# Altium PCB 宁波2号线PIS_数字功率放大器_功放板(BHC-A-2030-01)_PCB(06001536)_V1.0.PcbDoc (part 3 of 3)
Units mm, origin at the board's own origin, x right, y up, seen from the top; angles counter-clockwise.
Board outline 162 x 100 mm, 2 copper layers (Top Layer, Bottom Layer); 141 components, 101 nets, 408 pads, 79 vias.
Unrouted connection lines stored in the file: 2.
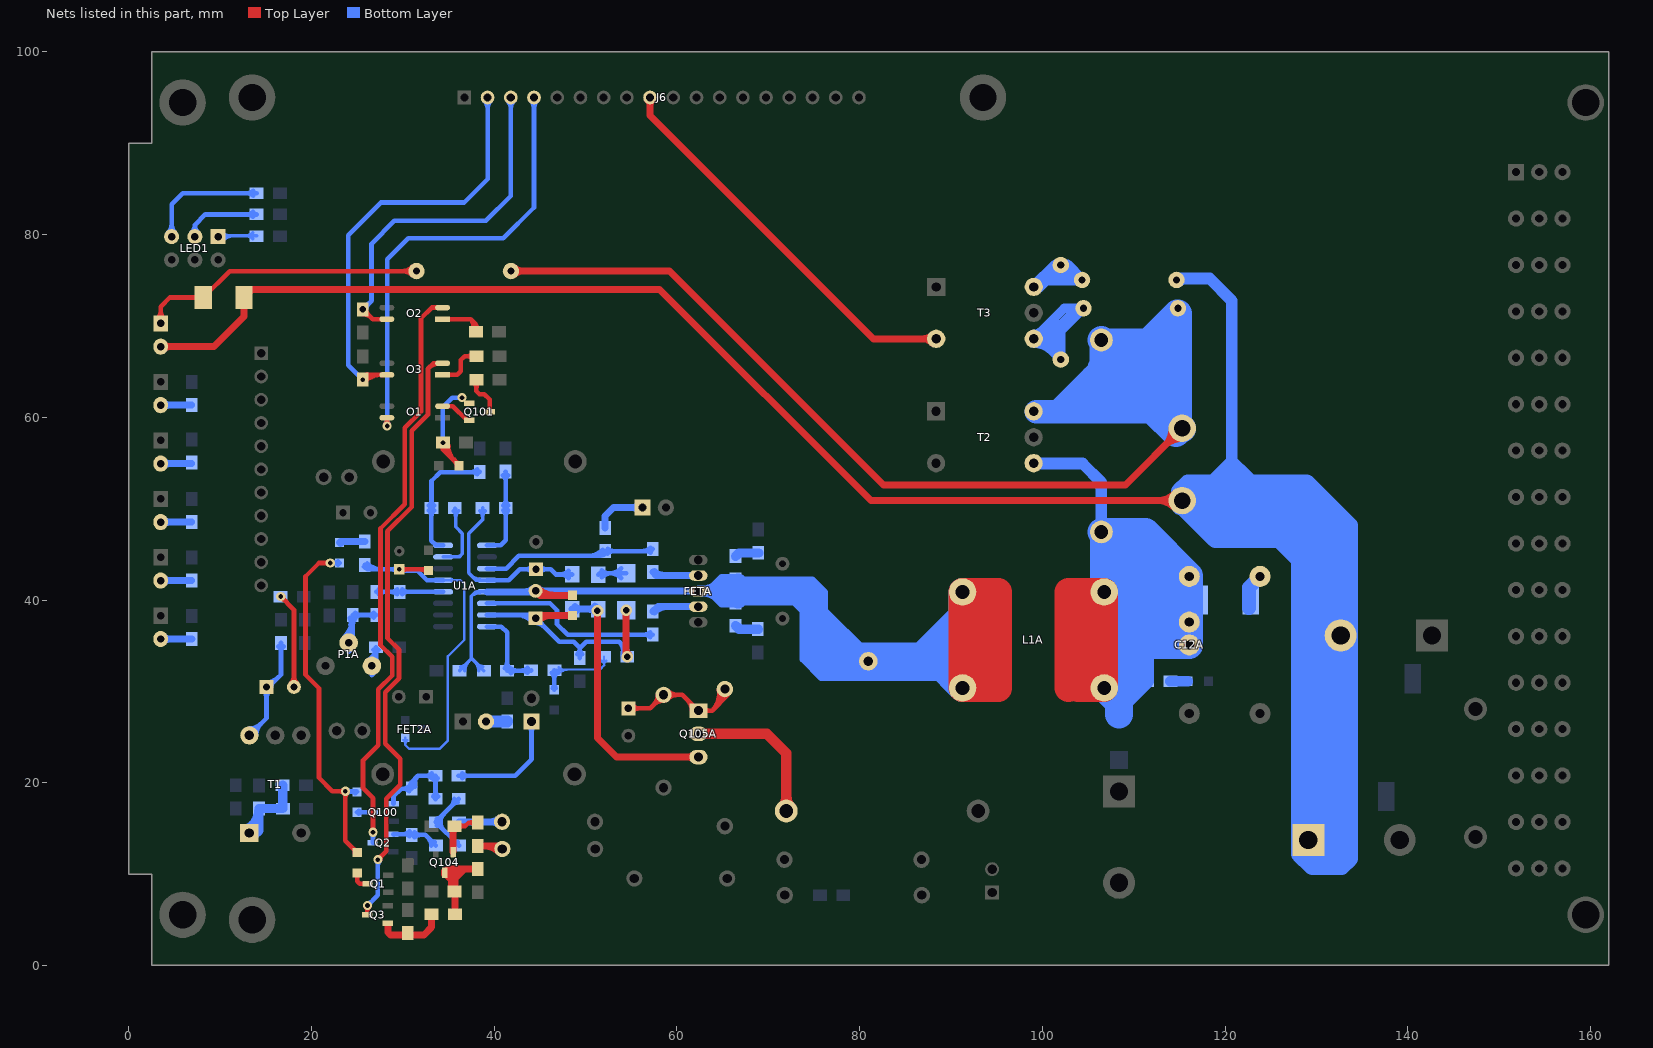
[diagram p3: the nets of this part, all layers, seen from the top]

## Via types
v1: diameter 1.016, hole 0.508, Top Layer to Bottom Layer, 57 vias
v2: diameter 1.27, hole 0.711, Top Layer to Bottom Layer, 21 vias
v3: diameter 0.762, hole 0.457, Top Layer to Bottom Layer, 1 vias

## Nets (pads, with @x,y where several pads share a name; then routed paths per layer and width w, separated by ;. In a path a pad name is that pad's centre, name@x,y a point inside that pad or via, vN(x,y) a via of type N, cw(c..) or ccw(c..) an arc to the next point about the centre after c; other vN are vias at no path point) (continued)
NetC4A_2: C4A.2 C6A.1 P1A.2 | length 17
  Bottom Layer w0.508: P1A.2@23.536,35.871 ccw(c21.137,38.27) C4A.2@24.53,38.27 ; P1A.2@23.896,35.512 ccw(c22.364,37.043) 24.53,37.043 ; 24.044,34.301 24.53,34.787 C4A.2@24.53,38.35 24.537,38.356 C6A.1@27.103,38.356 ; C4A.2@24.2,38.032 cw(c23.44,37.593) 24.288,37.366 ; C4A.2@24.261,37.953 cw(c23.61,37.303) 24.53,37.303 cw(c25.45,37.303) C4A.2@24.8,37.953 ; 24.273,37.309 cw(c25.201,37.06) C4A.2@24.721,37.893 ; C4A.2@24.8,38.08 cw(c25.466,37.414) 25.466,38.356 ; C4A.2@24.8,38.619 ccw(c25.434,39.254) 25.434,38.356 ; C6A.1@26.833,38.087 ccw(c26.183,37.437) 26.183,38.356 ccw(c26.183,39.276) C6A.1@26.833,38.626
NetC5_2: C5.2 R01.2 R02.1 T1.1 | length 12.2
  Bottom Layer w1.016: T1.1@12.963,14.939 ccw(c11.713,17.16) R02.1@14.262,17.16 ; T1.1@13.461,14.054 ccw(c12.691,15.422) 14.262,15.422 ; T1.1@14.042,14.561 14.262,14.78 R02.1@14.262,17.16 ; R01.2@16.854,19.733 16.854,17.193 14.295,17.193 R02.1@14.262,17.16
NetC6A_2: C6A.2 C7A.2 U1A.4 | length 11.6
  Bottom Layer w0.508: C6A.2@27.103,40.896 C7A.2@29.653,40.896 29.657,40.901 U1A.4@34.413,40.901 ; C6A.2@27.372,40.627 cw(c28.023,39.977) 28.023,40.896 cw(c28.023,41.816) C6A.2@27.372,41.166 ; C7A.2@29.383,40.627 ccw(c28.733,39.977) 28.733,40.896 ccw(c28.733,41.816) C7A.2@29.383,41.166 ; C7A.2@29.922,40.627 cw(c30.583,39.967) 30.583,40.901 ; C7A.2@29.922,41.166 ccw(c30.563,41.806) 30.563,40.901
NetC8A_2: C8A.2 R28A.1 | length 3.5
  Bottom Layer w1.016: R28A.1@66.413,44.804 66.761,45.152 C8A.2@68.948,45.152 ; R28A.1@66.503,44.841 cw(c67.253,44.092) 67.253,45.152
NetC9A_1: C9A.1 R29A.2 | length 3.6
  Bottom Layer w1.016: R29A.2@66.413,37.184 66.802,36.795 C9A.1@68.922,36.795 ; R29A.2@66.503,37.147 ccw(c67.353,37.996) 67.353,36.795
NetC13A_2: C13A.2 R30A.1 | length 3.9
  Bottom Layer w1.524: R30A.1@122.612,39.141 122.612,41.371 C13A.2@123.825,42.584
NetC100_2: C100.2 Q100.1 R1.1 R3.1 | length 17.1
  Bottom Layer w0.508: Q100.1@28.985,17.695 28.985,18.531 29.807,19.352 C100.2@30.958,19.352 30.958,20.072 31.654,20.768 ; C100.2@30.688,19.083 ccw(c30.038,18.433) 30.038,19.352 ccw(c30.038,20.272) C100.2@30.688,19.622 ; C100.2@30.835,19.448 cw(c31.534,19.627) 31.024,20.138 ; C100.2@31.327,19.574 cw(c32.538,19.884) 31.654,20.768 ; R3.1@33.161,20.499 ccw(c32.511,19.848) 32.511,20.768 ccw(c32.511,21.688) R3.1@33.161,21.037 ; R3.1@33.288,20.499 cw(c32.577,19.787) 33.583,19.787 ; R1.1@33.314,18.497 ccw(c32.663,19.148) 33.583,19.148 ccw(c34.503,19.148) R1.1@33.853,18.497 ; R1.1@33.583,18.228 33.583,20.743 R3.1@33.558,20.768 31.654,20.768 ; 33.583,19.91 cw(c34.416,19.91) R3.1@33.827,20.499
NetC101_2: C101.2 Q2.1 R2.2 | length 9.6
  Bottom Layer w0.508: Q2.1@29.03,14.298 Q2.1@28.96,14.368 30.938,14.368 31.008,14.298 32.449,14.298 R2.2@33.618,13.129 ; 29.951,14.368 ccw(c29.951,15.482) C101.2@30.739,14.694 ; 30.226,14.368 cw(c30.226,13.642) C101.2@30.739,14.155 ; C101.2@31.278,14.028 cw(c31.928,13.378) 31.928,14.298 cw(c31.928,15.218) C101.2@31.278,14.567 ; 32.75,13.996 cw(c31.883,13.129) R2.2@33.11,13.129 ; R2.2@33.057,13.69 ccw(c33.491,14.123) R2.2@33.491,13.51
NetC102_2: C102.2 Q3.1 R108.2 | length 7.3
  Top Layer w0.762: 28.368,4.274 28.368,3.639 28.664,3.343 30.526,3.343 32.314,3.343 33.16,4.19 R108.2@33.16,5.604
NetCP1A_2: CP1A.2 R2A.1 | length 13.4
  Top Layer w0.508: v1@16.633,40.139 cw(c16.633,39.526) 17.067,39.959 cw(c17.5,40.393) v1@16.887,40.393 ; v1(16.633,40.393) 18.084,38.942 CP1A.2@18.084,30.487 ; CP1A.2@17.725,30.846 ccw(c16.857,31.713) 18.084,31.713 ccw(c19.31,31.713) CP1A.2@18.443,30.846
NetCP3A_1: CP3A.1 D7A.2 FET2A.2 R3A.1 U1A.5 | length 47.8
  Top Layer w0.508: CP3A.1@29.388,43.116 CP3A.1@29.627,43.355 32.675,43.355 D7A.2@32.813,43.217 ; CP3A.1@29.852,43.131 cw(c30.394,42.589) 30.394,43.355 cw(c30.394,44.122) CP3A.1@29.852,43.58 ; 31.887,43.355 cw(c31.887,42.291) D7A.2@32.639,43.043
  Bottom Layer w0.254: FET2A.2@30.043,24.687 cw(c29.501,24.135) 30.275,24.135 ; FET2A.2@30.275,24.923 30.275,24.135 ; FET2A.2@30.506,24.687 ccw(c31.048,24.135) 30.275,24.135 ; U1A.5@34.413,42.171 36.307,42.171 36.739,41.739 36.739,35.643 34.936,33.839 34.936,24.634 34.007,23.705 30.705,23.705 30.275,24.135 ; U1A.5@35.335,42.048 cw(c35.631,41.753) 35.631,42.171 cw(c35.631,42.588) U1A.5@35.335,42.293
  Bottom Layer w0.508: R3A.1@25.755,43.632 ccw(c26.424,44.301) R3A.1@26.424,43.355 ; R3A.1@25.845,43.849 26.338,43.355 CP3A.1@29.627,43.355 29.77,43.212 31.608,43.212 32.65,42.171 U1A.5@34.413,42.171 ; R3A.1@26.114,43.991 ccw(c27.65,45.527) 27.65,43.355 ; CP3A.1@29.403,43.131 ccw(c28.861,42.589) 28.861,43.355 ccw(c28.861,44.122) CP3A.1@29.403,43.58 ; CP3A.1@29.852,43.58 ccw(c30.739,44.467) 30.739,43.212
NetCP5A_1: CP5A.1 R21A.1 R26A.2 U1A.12 | length 28.7
  Bottom Layer w0.381: 37.537,42.643 ccw(c38.413,43.519) U1A.12@38.413,42.28 ; R26A.2@38.411,49.762 cw(c37.653,49.003) 38.726,49.003 cw(c39.799,49.003) R26A.2@39.04,49.762 ; R26A.2@38.726,50.076 38.726,48.78 37.222,47.276 37.222,42.958 38.009,42.171 U1A.12@39.213,42.171
  Bottom Layer w0.508: U1A.12@39.213,42.171 41.591,42.171 42.784,43.364 CP5A.1@44.588,43.364 46.188,43.364 46.752,42.801 R21A.1@48.525,42.801 ; CP5A.1@44.229,43.005 ccw(c43.361,42.138) 43.361,43.364 ccw(c43.361,44.591) CP5A.1@44.229,43.724 ; CP5A.1@44.947,43.005 cw(c45.814,42.138) 45.814,43.364 cw(c45.814,44.591) CP5A.1@44.947,43.724 ; R21A.1@48.139,42.415 ccw(c47.207,41.482) 47.207,42.801 ccw(c47.207,44.119) R21A.1@48.139,43.187
NetCP6A_1: CP6A.1 D3A.2 R17A.1 R22A.1 U1A.15 Z105A.2 | length 46.1
  Top Layer w0.762: CP6A.1@44.537,38.005 44.822,38.29 Z105A.2@48.561,38.29 ; CP6A.1@44.806,37.736 cw(c46.144,36.398) 46.144,38.29 ; 54.443,34.679 ccw(c55.462,34.679) v2@54.741,33.959 ; v2(54.443,38.869) 54.443,33.898 v2(54.562,33.779)
  Bottom Layer w0.508: U1A.15@39.213,38.361 44.181,38.361 CP6A.1@44.537,38.005 ; 42.452,38.361 cw(c42.452,35.92) CP6A.1@44.178,37.646 ; 43.679,38.361 cw(c43.679,37.147) CP6A.1@44.537,38.005 ; CP6A.1@44.537,37.497 cw(c44.537,36.271) 45.404,37.138 cw(c46.271,38.005) CP6A.1@45.045,38.005 ; R17A.1@49.103,34.05 ccw(c48.453,34.7) 49.372,34.7 ccw(c50.292,34.7) R17A.1@49.642,34.05 ; R17A.1@49.372,33.653 49.372,34.712 ; R22A.1@54.072,33.896 ccw(c52.649,34.356) 53.706,35.414 ; 54.113,34.691 ccw(c55.494,34.621) R22A.1@54.468,33.694 ; R22A.1@54.188,33.851 ccw(c52.47,34.178) 53.706,35.414 ; 54.294,34.827 cw(c53.536,34.069) R22A.1@54.556,33.74 ; 54.385,34.736 cw(c53.61,33.961) R22A.1@54.687,33.755 ; v2(54.562,33.779) 54.562,34.559 ; CP6A.1@44.537,38.005 47.128,35.414 48.728,35.414 49.372,34.77 49.372,34.712 ; 49.372,34.712 50.074,35.414 53.706,35.414 ; 53.706,35.414 54.562,34.559 ; 54.562,34.559 cw(c53.955,34.559) 54.328,34.08 ccw(c53.955,34.559) 54.562,34.559 ; 54.562,34.559 ccw(c55.169,34.559) 54.796,34.08 cw(c55.169,34.559) 54.562,34.559
NetCP6A_2: CP6A.2 FETA.3 L1A.1 R8A.2 R19A.2 R28A.2 R29A.1 TP1.1 U1A.13 Z105A.1 | length 230.2
  Top Layer w0.762: CP6A.2@44.537,41.005 45.022,40.52 Z105A.1@48.561,40.52 ; CP6A.2@44.806,41.274 ccw(c46.628,43.096) 46.628,40.52
  Top Layer w3.048: 93.193,30.378 95.174,30.378 95.174,40.878 93.37,40.878 ; 93.193,30.378 L1A.1@91.262,30.378 L1A.1@91.262,40.878 93.37,40.878 ; 93.193,30.378 93.193,40.701 93.37,40.878
  Bottom Layer w0.381: R8A.2@36.207,32.27 37.501,33.564 37.501,33.651 ; R8A.2@36.334,32.715 ccw(c36.334,33.481) 36.876,32.939 ; R8A.2@36.779,32.27 cw(c38.158,32.27) 37.183,33.246 ; 37.9,33.252 cw(c36.925,32.276) R19A.2@38.304,32.276 ; 38.207,32.945 ccw(c38.749,33.487) R19A.2@38.749,32.721 ; U1A.13@38.412,40.791 ccw(c38.402,39.517) 37.501,40.418 ; R19A.2@38.876,32.276 37.501,33.651 ; U1A.13@39.213,40.901 37.984,40.901 37.501,40.418 ; 37.501,33.651 37.501,40.418
  Bottom Layer w0.635: 67.414,39.724 72.773,39.724 73.735,38.762 73.735,33.504 75.794,31.445 88.443,31.445 ; 67.436,42.264 74.83,42.264 76.225,40.869 76.225,38.71
  Bottom Layer w0.762: U1A.13@39.213,40.901 44.433,40.901 ccw(c44.433,41.005) CP6A.2@44.537,41.005 FETA.3@62.363,41.005 ; 43.365,40.901 ccw(c43.365,42.177) CP6A.2@44.268,41.274 ; CP6A.2@44.806,40.736 cw(c45.457,40.085) 45.457,41.005 cw(c45.457,41.925) CP6A.2@44.806,41.274 ; 76.225,38.71 79.985,34.95 86.309,34.95 90.17,38.811
  Bottom Layer w1.143: FETA.3@62.363,41.005 63.717,41.005 ; 64.337,41.625 cw(c62.772,43.19) 62.772,40.977 cw(c62.772,38.629) 64.433,40.289 ; R29A.1@66.413,39.746 64.976,39.746 63.717,41.005 ; R28A.2@66.413,42.264 64.976,42.264 63.717,41.005
  Bottom Layer w1.524: 63.717,41.005 64.6,41.005
  Bottom Layer w2.032: R28A.2@66.683,41.868 cw(c64.6,43.95) 64.6,41.005 ; R29A.1@66.688,40.115 ccw(c64.6,38.111) 64.6,41.005 ; 72.942,41.005 64.6,41.005
  Bottom Layer w3.048: 72.942,41.005 73.93,41.005 75.032,39.903 75.032,38.384 ; 86.208,32.664 76.835,32.664 75.032,34.468 75.032,38.384 ; L1A.1@91.262,40.878 91.262,38.202 ; 75.032,38.384 80.269,33.147 86.208,33.147 ; 86.208,33.147 88.494,33.147 L1A.1@91.262,30.378 91.262,34.722 ; 86.208,33.147 87.782,34.722 ; 87.782,34.722 91.262,34.722 ; 87.782,34.722 91.262,38.202 ; 91.262,34.722 91.262,38.202
NetCP101A_1: CP101A.1 Q105A.1 R115A.1 Z102A.2 | length 30.3
  Top Layer w0.508: CP101A.1@54.682,28.15 57.07,28.15 Z102A.2@58.543,29.623 60.601,29.623 62.023,28.201 62.023,27.896 63.852,27.896 ; CP101A.1@55.042,27.791 cw(c55.909,26.924) 55.909,28.15 cw(c55.909,29.376) CP101A.1@55.042,28.509 ; Z102A.2@57.908,29.623 cw(c56.375,29.623) 57.459,28.539 cw(c58.543,27.455) Z102A.2@58.543,28.988 ; Z102A.2@58.992,29.174 cw(c60.076,28.09) 60.076,29.623 cw(c60.076,31.156) Z102A.2@58.992,30.072 ; 61.015,29.218 cw(c59.379,27.582) Q105A.1@61.692,27.508 ; 61.43,28.793 cw(c60.573,27.936) Q105A.1@61.785,27.897 ; Q105A.1@62.609,27.51 cw(c63.541,26.578) 63.541,27.896 cw(c63.541,29.214) Q105A.1@62.609,28.282 ; 64.571,28.616 ccw(c63.222,29.964) R115A.1@65.111,30.232 ; R115A.1@64.608,30.161 cw(c61.962,29.786) 63.852,27.896 ; 65.291,29.335 ccw(c64.483,30.143) R115A.1@65.614,30.303 ; R115A.1@65.35,29.623 65.579,29.623 63.852,27.896
NetCSD1A_2: CSD1A.2 R14A.1 | length 2.3
  Bottom Layer w1.27: CSD1A.2@39.112,26.702 41.431,26.702 R14A.1@41.44,26.71
NetD1_2: D1.2 Q1.3 | length 3.1
  Top Layer w0.508: D1.2@24.841,9.947 cw(c24.421,9.527) 25.015,9.527 cw(c25.609,9.527) D1.2@25.189,9.947 ; D1.2@25.015,10.121 25.015,9.227 25.295,8.948 Q1.3@26.176,8.948
NetD1A_1: D1A.1 R3A.2 | length 3.3
  Bottom Layer w0.762: D1A.1@23.079,46.286 23.182,46.389 R3A.2@25.845,46.389 ; D1A.1@23.163,46.202 cw(c23.615,45.749) 23.615,46.389
NetD2_2: D2.2 Q100.3 | length 2.7
  Bottom Layer w0.508: D2.2@24.99,16.776 26.704,16.776 Q100.3@26.735,16.745 ; D2.2@25.164,16.602 cw(c25.584,16.182) 25.584,16.776 cw(c25.584,17.37) D2.2@25.164,16.95
NetD3A_1: D3A.1 R20A.1 | length 8
  Bottom Layer w0.508: R20A.1@51.395,42.775 51.552,42.933 D3A.1@54.443,42.933 ; R20A.1@51.781,42.489 cw(c52.852,41.419) 52.852,42.933 ; R20A.1@51.781,43.261 ccw(c52.575,44.055) 52.575,42.933 ; D3A.1@53.915,42.405 ccw(c52.642,41.132) 52.642,42.933 ccw(c52.642,44.734) D3A.1@53.915,43.46
NetD4A_1: D4A.1 R18A.2 R22A.2 | length 14.8
  Bottom Layer w0.254: R18A.2@46.582,32.295 46.679,32.392 51.573,32.392 52.055,32.874 52.022,32.908 ; R18A.2@46.889,32.115 cw(c47.556,31.449) 47.556,32.392 ; R18A.2@47.068,31.936 cw(c48.169,30.835) 48.169,32.392 ; R18A.2@47.068,32.654 ccw(c47.702,33.288) 47.702,32.392 ; R22A.2@51.772,33.337 cw(c51.528,32.908) 52.022,32.908 ; R22A.2@52.022,33.779 52.022,32.908 ; R22A.2@52.272,33.337 ccw(c52.515,32.908) 52.022,32.908
  Bottom Layer w0.508: R18A.2@46.313,32.026 cw(c45.662,31.375) 46.582,31.375 cw(c47.502,31.375) R18A.2@46.852,32.026 ; D4A.1@46.405,30.36 ccw(c45.977,30.787) 46.582,30.787 ; D4A.1@46.579,30.186 46.582,30.189 R18A.2@46.582,32.295 ; 46.582,30.772 ccw(c47.165,30.772) D4A.1@46.753,30.36
NetD12_K: D12.K LED2.1 R52.1 | length 35.9
  Top Layer w0.508: LED2.1@3.123,70.749 ccw(c2.212,71.659) 3.5,71.659 ccw(c4.788,71.659) LED2.1@3.877,70.749 ; LED2.1@3.5,70.27 3.5,72.1 4.513,73.113 D12.K@8.171,73.113 11.058,76 R52.1@31.5,76 ; R52.1@31.043,75.543 ccw(c29.94,74.44) 29.94,76 ccw(c29.94,77.56) R52.1@31.043,76.457
NetDg1_2: Dg1.2 Q101.1 Rg.2 | length 21.3
  Top Layer w0.508: Rg.2@34.149,56.939 cw(c33.795,56.474) 34.38,56.474 ; Rg.2@34.2,57.063 cw(c33.766,56.629) 34.38,56.629 cw(c34.993,56.629) Rg.2@34.559,57.063 ; Rg.2@34.25,57.024 cw(c33.079,55.051) 35.302,55.619 ; Rg.2@34.253,57.022 cw(c33.946,56.491) 34.538,56.65 cw(c35.131,56.809) Rg.2@34.6,57.115 ; Rg.2@34.509,57.461 cw(c33.965,56.543) Rg.2@34.999,56.807 ; Rg.2@34.61,56.939 ccw(c34.964,56.474) 34.38,56.474 ; Rg.2@34.888,57.242 ccw(c37.969,57.242) Dg1.2@35.79,55.063 ; 34.923,55.931 cw(c36.235,57.242) Rg.2@34.38,57.242 34.38,56.474 ; 35.583,55.423 ccw(c36.498,55.951) Dg1.2@36.224,54.931 ; Dg1.2@35.915,54.693 ccw(c35.321,54.693) 35.741,55.113 ccw(c36.161,55.533) Dg1.2@36.161,54.939 ; Dg1.2@36.161,54.693 34.38,56.474
  Bottom Layer w0.508: v1@34.2,57.422 ccw(c33.766,57.856) 34.38,57.856 ; v1@34.559,57.422 cw(c34.993,57.856) 34.38,57.856 ; v1(36.485,62.154) 35.408,62.154 34.38,61.126 34.38,57.856
  other v1: 34.392,57.201
NetFETA_2: FETA.2 R25A.2 | length 6.2
  Bottom Layer w0.762: R25A.2@57.373,43.051 57.72,42.705 FETA.2@62.363,42.705 ; R25A.2@57.553,43.104 ccw(c58.516,44.067) 58.516,42.705
NetFETA_4: FETA.4 R24A.2 | length 6.9
  Bottom Layer w0.762: R24A.2@57.355,38.75 57.91,39.305 FETA.4@62.363,39.305 ; R24A.2@57.534,38.697 cw(c59.002,37.23) 59.002,39.305
NetJ1_1: J1.1 R3.2 | length 16.2
  Bottom Layer w0.508: R3.2@36.098,20.768 42.297,20.768 44.091,22.562 J1.1@44.091,26.702 ; R3.2@36.494,20.499 cw(c37.145,19.848) 37.145,20.768 cw(c37.145,21.688) R3.2@36.494,21.037 ; J1.1@43.731,26.343 cw(c42.864,25.476) 44.091,25.476 cw(c45.317,25.476) J1.1@44.45,26.343
NetJ4_1: J4.1 R52.2 R110.1 R114.1 T2.3 | length 268.4
  Top Layer w0.762: R52.2@41.838,76 59.2,76 82.6,52.6 109.1,52.6 J4.1@115.3,58.8 ; R52.2@42.205,75.633 cw(c43.091,74.747) 43.091,76 cw(c43.091,77.253) R52.2@42.205,76.367 ; J4.1@114.181,58.8 cw(c111.479,58.8) 113.39,56.89 cw(c115.3,54.979) J4.1@115.3,57.681
  Bottom Layer w2.032: 105.446,60.9 105.446,63.384 105.446,64.372 105.446,64.618 105.692,64.618 106.451,64.618 113.371,64.618 114.833,63.155 114.962,63.027 ; 105.612,64.783 ccw(c108.771,67.942) 108.771,63.475 ; 105.68,64.605 ccw(c108.534,64.454) 106.513,62.434 ; 112.62,63.083 cw(c107.804,58.268) J4.1@114.614,58.268 ; 113.34,62.362 cw(c109.778,58.8) J4.1@114.816,58.8 ; 113.725,61.588 ccw(c117.492,62.597) J4.1@115.542,59.219 ; 113.741,59.93 ccw(c115.3,61.489) J4.1@115.3,59.284 ; 113.803,59.868 111.491,62.179 108.164,62.179 106.579,60.595 106.513,60.528 106.513,60.595 106.513,62.433 106.451,62.495 105.504,63.442 105.472,63.475 105.537,63.475 106.451,63.475 112.228,63.475 114.833,60.869 ; 114.962,60.741 ccw(c117.18,60.741) J4.1@115.637,59.148 ; 114.962,60.785 ccw(c117.285,60.785) J4.1@115.642,59.142 ; 115.098,60.605 115.098,62.891 115.011,62.978 114.962,63.027 ; 114.833,60.869 cw(c113.901,59.937) 114.924,59.105 ccw(c113.901,59.937) 114.833,60.869 ; 114.833,60.869 114.962,60.741 114.962,63.027 ; J4.1@115.642,59.142 cw(c116.956,60.456) 115.098,60.456 ccw(c116.956,60.456) J4.1@115.642,59.142
  Bottom Layer w2.54: T2.3@99.339,60.595 101.669,60.595 ; 111.862,68.453 R110.1@106.451,68.453 106.451,65.377 ; 112.228,63.475 113.371,64.618 ; 113.982,59.576 ccw(c115.3,60.893) J4.1@115.3,59.03 ; 115.098,62.891 115.098,66.345 ; J4.1@115.124,58.369 115.124,66.37 115.098,66.345 ; 101.669,60.595 106.513,60.595 106.579,60.595 112.287,60.595 112.963,60.595 114.833,58.725 115.011,58.547 115.011,62.978 115.011,66.258 ; 101.669,60.595 105.446,64.372 105.692,64.618 106.451,65.377 ; 106.451,65.377 112.612,65.377 113.371,64.618 ; 113.371,64.618 114.833,66.08 115.011,66.258 ; 115.011,66.258 115.098,66.345
  Bottom Layer w3.048: 105.446,60.9 106.451,61.905 106.451,62.495 106.451,63.475 106.451,64.389 ; 105.446,63.384 105.504,63.442 105.537,63.475 106.451,64.389 ; 106.451,65.377 106.451,64.618 106.451,64.389 ; R110.1@106.451,68.453 107.803,67.101 113.812,67.101 ; 112.287,60.595 J4.1@114.614,58.268 ; 113.262,59.62 ccw(c115.3,61.659) J4.1@115.3,58.776 ; J4.1@114.833,58.487 114.833,58.725 114.833,60.869 114.833,63.155 114.833,66.08 ; 113.812,67.101 112.461,68.453 111.862,68.453 114.757,71.349 114.833,71.349 114.833,66.08 ; 113.812,67.101 114.833,66.08
NetLED1_1: LED1.1 R72.1 | length 9.1
  Bottom Layer w0.381: LED1.1@9.779,79.87 R72.1@14.01,79.87 ; LED1.1@9.959,79.59 cw(c10.633,78.916) 10.633,79.87 ; LED1.1@10.228,79.321 cw(c11.552,77.997) 11.552,79.87 ; LED1.1@10.228,80.219 ccw(c11.072,81.063) 11.072,79.87 ; R72.1@13.568,79.555 ccw(c12.81,78.796) 12.81,79.87 ccw(c12.81,80.943) R72.1@13.568,80.184
NetLED1_3: LED1.3 R69.1 | length 13.4
  Bottom Layer w0.508: LED1.3@6.86,80.198 ccw(c6.116,81.039) 7.239,81.039 ; LED1.3@7.239,79.77 7.239,81.039 ; LED1.3@7.618,80.198 cw(c8.362,81.039) 7.239,81.039 ; 9.9,82.2 8.4,82.2 ; R69.1@13.602,81.931 ccw(c12.952,81.281) 12.952,82.2 ccw(c12.952,83.12) R69.1@13.602,82.47 ; R69.1@13.999,82.2 8.4,82.2 ; 7.239,81.039 8.4,82.2
NetLED1_5: LED1.5 R67.1 | length 16.9
  Bottom Layer w0.508: LED1.5@4.295,80.174 ccw(c3.319,81.15) 4.699,81.15 ccw(c6.079,81.15) LED1.5@5.103,80.174 ; LED1.5@4.699,79.77 4.699,83.299 5.924,84.524 R67.1@14,84.524 ; R67.1@13.613,84.248 ccw(c12.963,83.598) 12.963,84.518 ccw(c12.963,85.438) R67.1@13.613,84.787
NetLED1A_1: LED1A.1 R23A.2 | length 7.7
  Bottom Layer w0.762: R23A.2@52.148,47.894 52.148,49.197 53.071,50.121 LED1A.1@56.246,50.121 ; LED1A.1@55.887,49.762 ccw(c55.02,48.894) 55.02,50.121 ccw(c55.02,51.347) LED1A.1@55.887,50.48
NetLED3_2: LED3.2 R77.1 | length 4.9
  Bottom Layer w0.762: LED3.2@3.5,61.33 R77.1@6.901,61.33 ; LED3.2@3.787,61.043 cw(c4.481,60.349) 4.481,61.33 cw(c4.481,62.311) LED3.2@3.787,61.617
NetLED4_2: LED4.2 R90.1 | length 4.9
  Bottom Layer w0.762: LED4.2@3.5,54.93 R90.1@6.901,54.93 ; LED4.2@3.787,54.643 cw(c4.481,53.949) 4.481,54.93 cw(c4.481,55.911) LED4.2@3.787,55.217
NetLED5_2: LED5.2 R100.1 | length 4.9
  Bottom Layer w0.762: LED5.2@3.5,48.53 R100.1@6.901,48.53 ; LED5.2@3.787,48.243 cw(c4.481,47.549) 4.481,48.53 cw(c4.481,49.511) LED5.2@3.787,48.817
NetLED6_2: LED6.2 R82.2 | length 4.9
  Bottom Layer w0.762: LED6.2@3.5,42.13 R82.2@6.901,42.13 ; LED6.2@3.787,41.843 cw(c4.481,41.149) 4.481,42.13 cw(c4.481,43.111) LED6.2@3.787,42.417
NetLED7_2: LED7.2 R73.2 | length 5
  Bottom Layer w0.762: LED7.2@3.5,35.73 3.508,35.722 R73.2@6.909,35.722 ; LED7.2@3.787,35.443 cw(c4.461,34.769) 4.461,35.722 ; LED7.2@3.787,36.017 ccw(c4.501,36.731) 4.501,35.722
NetO1_2: O1.2 Q101.2 | length 3.6
  Top Layer w0.508: O1.2@34.352,61.214 35.469,61.214 37.029,59.655 Q101.2@37.265,59.655
NetO2_1: O2.1 R119.2 | length 8.3
  Top Layer w0.508: O2.1@34.352,70.739 37.425,70.739 ; R119.2@37.553,69.557 ccw(c36.754,70.069) 37.425,70.739 ; R119.2@37.758,69.645 ccw(c37.327,70.163) 38.001,70.163 ; 37.872,70.293 cw(c37.299,69.72) R119.2@37.981,69.283 ; R119.2@38.001,69.352 38.001,70.163 ; R119.2@38.244,69.645 cw(c38.675,70.163) 38.001,70.163 ; 37.425,70.739 38.001,70.163
NetO2_2: O2.2 Q2.3 | length 66.3
  Top Layer w0.508: v1@26.563,14.766 ccw(c26.129,15.2) 26.742,15.2 ccw(c27.356,15.2) v1@26.922,14.766 ; v1(26.742,14.586) 26.742,18.32 25.65,19.412 25.65,22.46 27.301,24.111 27.301,30.218 28.825,31.742 28.825,33.789 27.555,35.059 27.555,47.824 30.226,50.495 30.226,51.308 30.226,58.852 31.989,60.615 31.989,70.841 33.158,72.009 O2.2@34.352,72.009
  Bottom Layer w0.508: v1@26.563,14.407 cw(c26.129,13.973) 26.742,13.973 cw(c27.356,13.973) v1@26.922,14.407 ; Q2.3@26.71,13.418 26.742,13.451 v1(26.742,14.586)
NetO3_1: O3.1 R122.2 | length 6.7
  Top Layer w0.508: O3.1@34.352,64.643 35.952,64.643 36.358,65.05 36.358,66.269 36.774,66.685 R122.2@38.052,66.685 ; R122.2@37.655,66.415 ccw(c37.005,65.765) 37.005,66.685 ccw(c37.005,67.604) R122.2@37.655,66.954
NetO3_2: O3.2 Q3.3 | length 73.4
  Top Layer w0.508: v1@25.953,6.38 cw(c25.537,5.965) 26.125,5.965 ; Q3.3@26.125,5.569 26.125,6.553 v1(26.133,6.56) ; 26.125,5.929 cw(c26.764,5.929) v1@26.312,6.38 ; v1(27.276,11.589) 28.19,12.504 28.19,18.244 29.714,19.768 29.714,22.638 28.063,24.289 28.063,29.903 29.587,31.427 29.587,34.576 28.317,35.846 28.317,46.463 28.317,47.509 30.988,50.18 30.988,58.536 32.751,60.3 ; v1@27.276,11.843 ccw(c27.276,12.456) 27.709,12.023 ccw(c28.143,11.589) v1@27.53,11.589 ; 32.751,62.052 32.751,60.3 ; 32.933,65.485 cw(c33.844,64.575) O3.2@33.844,65.862 ; O3.2@34.352,65.913 33.361,65.913 32.751,65.304 32.751,60.3
  Bottom Layer w0.508: v1(26.133,6.56) 27.276,7.703 v1(27.276,11.589) ; v1@26.133,6.814 ccw(c26.133,7.427) 26.566,6.994 ccw(c27,6.56) v1@26.387,6.56 ; v1@27.096,11.41 cw(c26.663,10.976) 27.276,10.976 cw(c27.889,10.976) v1@27.455,11.41
NetP1A_3: P1A.3 R11A.1 | length 7.6
  Bottom Layer w0.508: P1A.3@26.248,33.46 ccw(c25.486,34.845) R11A.1@27.067,34.845 27.067,32.244 26.584,31.761 ; P1A.3@26.493,33.015 ccw(c25.959,33.986) 27.067,33.986 ; R11A.1@26.798,34.576 cw(c26.147,33.925) 27.067,33.925 cw(c27.987,33.925) R11A.1@27.337,34.576
NetQ101_3: Q101.3 Rs.2 | length 5.9
  Top Layer w0.508: Rs.2@37.782,63.824 cw(c37.132,63.174) 38.052,63.174 cw(c38.972,63.174) Rs.2@38.321,63.824 ; Rs.2@38.052,64.094 38.052,62.873 38.39,62.535 38.924,62.535 39.515,61.943 Q101.3@39.515,60.605
NetQ104_1: Q104.1 R112.2 R113.1 | length 9.1
  Top Layer w0.508: R113.1@35.516,15.097 R113.1@35.675,15.256 35.691,15.272 36.826,15.272 37.19,15.636 R112.2@38.207,15.636 ; R113.1@36.071,14.987 cw(c36.76,14.298) 36.76,15.272 ; R113.1@36.071,15.526 ccw(c36.683,16.137) 36.683,15.272 ; R112.2@37.938,15.367 ccw(c37.287,14.716) 37.287,15.636 ccw(c37.287,16.556) R112.2@37.938,15.905
  Top Layer w0.762: Q104.1@35.516,12.409 R113.1@35.516,15.097 ; 35.516,14.565 cw(c36.239,14.565) R113.1@35.728,15.077
NetQ104_3: Q104.3 R107.1 R108.1 R111.2 | length 19.9
  Top Layer w0.762: Q104.3@34.563,9.965 cw(c34.61,8.425) 35.7,9.515 ; Q104.3@34.566,9.965 cw(c34.566,9.497) 34.897,9.828 ; Q104.3@34.566,10.353 ccw(c34.566,10.822) 34.897,10.491 ; 35.302,9.3 ccw(c36.755,9.3) R107.1@35.728,8.273 ; R107.1@35.345,8.247 ccw(c34.965,8.534) 35.302,8.871 ; R107.1@35.495,7.914 cw(c35,7.419) 35.7,7.419 ; R107.1@35.495,8.273 ccw(c35,8.768) 35.7,8.768 ; R107.1@35.654,8.324 cw(c35.904,8.871) 35.302,8.871 ; R107.1@35.675,8.093 35.675,8.499 35.302,8.871 ; R108.1@35.7,5.604 35.7,9.515 ; R111.2@38.182,10.556 36.742,10.556 ; Q104.3@34.566,10.159 34.962,10.556 36.14,10.556 ; Q104.3@34.566,10.159 35.302,9.423 35.302,8.871 ; Q104.3@34.566,10.159 35.056,10.159 ; 35.056,10.159 35.744,10.159 36.14,10.556 ; 35.056,10.159 35.7,9.515 ; 35.7,9.515 36.742,10.556 ; 36.14,10.556 36.742,10.556
NetQ105A_2: Q105A.2 R114A.1 | length 19.7
  Top Layer w1.143: Q105A.2@62.023,25.356 69.843,25.356 71.969,23.23 R114A.1@71.969,16.917 ; R114A.1@71.504,17.308 ccw(c70.346,18.466) 71.984,18.466 ccw(c73.622,18.466) R114A.1@72.463,17.308
NetR1_2: R1.2 R2.1 R106.2 | length 13
  Bottom Layer w0.508: R106.2@33.745,15.314 cw(c33.745,14.762) R106.2@34.135,15.152 ; R106.2@33.745,16.076 ccw(c33.745,16.622) R106.2@34.131,16.236 ; 34.503,14.784 cw(c35.413,15.695) 34.126,15.695 cw(c35.419,15.695) 34.504,16.609 ; 35.256,17.361 ccw(c34.389,18.228) R1.2@35.615,18.228 ; 35.29,13.996 cw(c34.423,13.129) R2.1@35.65,13.129 ; R1.2@35.563,17.667 cw(c35.996,17.234) R1.2@35.996,17.847 ; R2.1@35.597,13.69 ccw(c36.031,14.123) R2.1@36.031,13.51 ; R1.2@36.123,18.228 33.618,15.722 R106.2@33.618,15.695 33.618,15.669 R2.1@36.158,13.129
NetR12A_2: R12A.2 R13A.1 U1A.8 | length 18.1
  Bottom Layer w0.508: R13A.1@32.873,49.801 cw(c32.246,49.174) 33.132,49.174 ; R13A.1@32.873,50.339 ccw(c32.222,50.99) 33.142,50.99 ccw(c34.062,50.99) R13A.1@33.412,50.339 ; 33.132,49.127 cw(c34.086,49.127) R13A.1@33.412,49.801 ; U1A.8@34.413,45.981 33.64,45.981 33.132,46.489 33.132,50.06 R13A.1@33.142,50.07 33.142,53.026 34.098,53.982 38.363,53.982 R12A.2@38.413,54.032 ; 37.371,53.982 ccw(c37.371,55.075) R12A.2@38.144,54.302 ; 37.616,53.982 cw(c37.616,53.235) R12A.2@38.144,53.763
NetR13A_2: R13A.2 U1A.7 | length 9.3
  Bottom Layer w0.381: U1A.7@34.413,44.711 36.155,44.711 36.511,45.066 36.511,47.276 35.774,48.013 35.774,49.978 R13A.2@35.682,50.07 ; R13A.2@35.495,49.756 cw(c34.821,49.082) 35.774,49.082 ; 35.774,48.912 cw(c36.967,48.912) R13A.2@36.124,49.756
NetR18A_1: R18A.1 R19A.1 U1A.16 | length 13.6
  Bottom Layer w0.508: U1A.16@39.213,37.091 40.778,37.091 41.416,36.453 R19A.1@41.416,32.276 44.023,32.276 R18A.1@44.042,32.295 ; R19A.1@41.146,32.546 ccw(c40.496,33.196) 41.416,33.196 ccw(c42.336,33.196) R19A.1@41.685,32.546 ; R19A.1@41.812,32.007 cw(c42.463,31.356) 42.463,32.276 cw(c42.463,33.196) R19A.1@41.812,32.546 ; 42.95,32.276 ccw(c42.95,33.26) R18A.1@43.646,32.564 ; 43.041,32.276 cw(c43.041,31.421) R18A.1@43.646,32.026
NetR23A_1: R23A.1 R25A.1 U1A.11 | length 24.5
  Bottom Layer w0.508: U1A.11@39.213,43.441 41.311,43.441 42.708,44.838 51.631,44.838 R23A.1@52.148,45.354 57.136,45.354 R25A.1@57.373,45.591 ; 50.288,44.838 ccw(c50.288,47.086) R23A.1@51.878,45.496 ; R23A.1@51.515,44.838 ccw(c51.515,45.86) R23A.1@52.237,45.137 ; R23A.1@52.417,45.084 cw(c53.067,44.434) 53.067,45.354 cw(c53.067,46.274) R23A.1@52.417,45.623 ; 56.187,45.354 ccw(c56.187,46.651) R25A.1@57.104,45.734 ; 56.72,45.354 cw(c56.72,44.811) R25A.1@57.104,45.195
NetR24A_1: R24A.1 U1A.14 | length 21.9
  Bottom Layer w0.508: U1A.14@39.213,39.631 46.112,39.631 46.874,38.869 46.874,37.37 48.042,36.202 48.05,36.21 R24A.1@57.355,36.21 ; R24A.1@57.085,35.94 ccw(c56.435,35.29) 56.435,36.21 ccw(c56.435,37.13) R24A.1@57.085,36.479
NetR26A_1: R26A.1 R27A.2 U1A.9 | length 14.2
  Bottom Layer w0.508: U1A.9@39.213,45.981 40.727,45.981 41.286,46.539 41.266,46.559 R26A.1@41.266,50.076 41.266,54.03 R27A.2@41.238,54.057 ; R27A.2@40.969,53.661 cw(c40.252,52.945) 41.266,52.945 ; R26A.1@40.996,49.807 cw(c40.346,49.156) 41.266,49.156 cw(c42.186,49.156) R26A.1@41.535,49.807 ; R26A.1@40.996,50.346 ccw(c40.346,50.996) 41.266,50.996 ccw(c42.186,50.996) R26A.1@41.535,50.346 ; 41.266,53.077 cw(c42.092,53.077) R27A.2@41.508,53.661
NetR31A_1: R31A.1 Z108.2 | length 1.9
  Bottom Layer w1.143: R31A.1@114.012,31.106 114.022,31.115 Z108.2@115.931,31.115
NetR106_1: R106.1 Z100.1 | length 7.2
  Bottom Layer w0.762: R106.1@36.158,15.695 36.192,15.729 Z100.1@40.865,15.729 ; R106.1@36.464,15.515 cw(c36.982,14.997) 36.982,15.729 ; Z100.1@40.506,15.37 ccw(c39.638,14.503) 39.638,15.729 ccw(c39.638,16.956) Z100.1@40.506,16.089
NetR112_1: R112.1 Z101.1 | length 4.7
  Top Layer w0.762: R112.1@38.207,13.096 40.552,13.096 Z101.1@40.89,12.758 ; 38.847,13.096 cw(c38.847,10.714) Z101.1@40.531,12.398
NetR114_2: R114.2 R120.1 T3.5 | length 40.7
  Bottom Layer w1.016: T3.5@99.057,68.066 ccw(c99.057,70.241) 100.596,68.703 ; T3.5@99.057,68.098 cw(c99.057,65.245) 101.075,67.262 ; T3.5@99.549,68.59 cw(c100.737,68.59) 99.897,69.43 cw(c99.057,70.27) 99.057,69.082 ccw(c99.057,73.71) 102.33,70.437 ; T3.5@99.405,68.242 cw(c100.245,67.402) 100.245,68.59 ; T3.5@99.405,68.242 cw(c100.245,67.402) 100.245,68.59 ; T3.5@99.405,68.242 cw(c100.245,67.402) 100.245,68.59 ; T3.5@99.405,68.938 ccw(c100.245,69.778) 100.245,68.59 ; T3.5@99.405,68.938 ccw(c100.245,69.778) 100.245,68.59 ; T3.5@99.405,68.938 ccw(c100.245,69.778) 100.245,68.59 ; T3.5@99.747,68.59 R120.1@102.017,66.32 102.017,67.725 ; T3.5@99.747,68.59 T3.5@99.057,68.59 102.4,71.933 103.073,71.933 ; T3.5@99.747,68.59 100.482,68.59 ; 100.482,68.59 101.153,68.59 ; 100.482,68.59 103.073,71.181 103.073,71.933 ; 101.153,68.59 102.017,67.725 ; 101.153,68.59 102.017,69.454 ; 102.017,67.725 102.017,69.454 ; 102.017,69.454 R114.2@104.496,71.933 103.073,71.933
NetR115_2: R115.2 R120.2 T3.3 | length 18.9
  Bottom Layer w1.27: T3.3@98.984,74.193 T3.3@99.06,74.27 ; T3.3@99.06,74.27 T3.3@99.057,74.27 101.445,76.657 R120.2@102.017,76.657 ; T3.3@99.06,74.27 99.63,74.27 100.391,75.032 ; T3.3@99.06,74.27 99.822,75.032 100.391,75.032 ; 100.391,75.032 R120.2@102.017,76.657 ; 100.391,75.032 R115.2@103.643,75.032 ; R120.2@102.017,76.657 102.717,76.657 R115.2@104.343,75.032 R115.2@103.643,75.032 ; R120.2@102.017,76.657 R115.2@103.643,75.032
OUT_CHUJI+: C12A.2 D5A.1 D6A.2 L1A.2 R30A.2 R31A.2 R110.2 T2.5 | length 187.5
  Top Layer w3.048: 102.851,30.378 102.851,40.878 L1A.2@106.762,40.878 ; 104.328,40.878 104.292,40.843 ; 104.292,40.843 106.727,40.843 L1A.2@106.762,40.878 ; 104.292,40.843 103.886,40.437 103.886,30.378 L1A.2@106.762,30.378 ; L1A.2@106.762,30.378 L1A.2@106.762,40.878 ; L1A.2@106.762,30.378 104.654,30.378 104.832,30.556 104.832,40.878 L1A.2@106.762,40.878
  Bottom Layer w1.27: T2.5@99.111,54.94 104.394,54.94 106.451,52.883 R110.2@106.451,47.453
  Bottom Layer w1.524: D5A.1@108.382,28.015 R31A.2@111.472,31.106 ; 108.382,31.699 108.975,31.106 110.388,31.106 ; 111.272,43.135 110.388,42.252 110.388,36.322 110.388,34.519 110.388,31.106 ; 111.472,35.603 111.472,35.425 R31A.2@111.472,31.106 ; 110.388,31.106 R31A.2@111.472,31.106
  Bottom Layer w3.048: D5A.1@108.382,27.483 108.382,28.015 108.382,28.759 ; 110.388,34.519 110.566,34.519 111.472,35.425 ; 110.388,36.322 112.37,36.322 ; C12A.2@116.078,42.584 C12A.2@116.078,38.659 ; C12A.2@116.078,42.647 111.272,47.453 ; 108.331,47.453 108.382,47.402 108.382,31.699 108.382,28.759 ; 108.331,47.453 R110.2@106.451,47.453 106.762,47.142 L1A.2@106.762,40.878 L1A.2@106.762,30.378 108.382,28.759 ; 108.331,47.453 111.272,47.453 ; 111.272,47.453 111.272,43.135 112.37,42.037 ; 111.472,35.425 111.813,35.084 C12A.2@116.078,35.084 C12A.2@116.078,37.584 C12A.2@116.078,38.659 ; 111.472,35.425 112.37,36.322 ; 112.37,36.322 113.03,36.982 ; 112.37,36.322 112.37,42.037 ; 112.37,42.037 113.03,41.377 ; 113.03,36.982 113.03,41.377 ; 113.03,36.982 114.402,36.982 C12A.2@115.913,38.494 ; 113.03,41.377 C12A.2@115.913,38.494 ; C12A.2@115.913,38.494 C12A.2@116.078,38.659
OUT_CHUJI-: CP9.2 CP10.1 D12.A J4.2 LED2.2 R115.1 R116.1 R117.2 | length 467.8
  Top Layer w0.762: LED2.2@3.5,67.73 9.33,67.73 12.616,71.016 D12.A@12.616,73.113 13.503,74 58.1,74 81.22,50.88 J4.2@115.3,50.88 ; LED2.2@3.787,67.443 cw(c4.481,66.749) 4.481,67.73 cw(c4.481,68.711) LED2.2@3.787,68.017 ; J4.2@114.509,50.089 ccw(c112.598,48.178) 112.598,50.88 ccw(c112.598,53.582) J4.2@114.509,51.671
  Bottom Layer w1.27: R115.1@114.868,74.844 cw(c115.689,74.023) 115.689,75.184 ; R115.1@114.971,75.184 118.324,75.184 120.737,72.771 120.737,55.22 ; 118.248,52.731 120.737,55.22 ; 120.737,52.934 120.737,55.22 ; 122.363,52.731 122.363,53.594 ; 124.801,51.562 124.395,51.562 123.226,52.731 122.363,53.594 ; 120.737,55.22 122.363,53.594
  Bottom Layer w2.032: J4.2@115.098,50.348 J4.2@115.29,50.348 ; J4.2@115.098,51.842 115.987,52.731 118.248,52.731 122.363,52.731 123.226,52.731 128.905,52.731 133.528,48.108 133.528,11.735 132.69,10.897 131.42,10.897 ; J4.2@115.3,50.396 cw(c115.3,44.771) 119.278,48.748 ; J4.2@115.546,50.532 cw(c117.418,51.3) 115.987,52.731 ccw(c116.978,51.74) J4.2@115.731,51.101 ; J4.2@115.591,50.494 cw(c116.551,49.221) 117.678,50.348 ; J4.2@115.771,50.769 cw(c118.248,50.186) 118.248,52.731 ; J4.2@115.784,50.88 ccw(c118.26,50.88) 116.509,49.129 ; 117.079,50.627 cw(c117.079,52.659) 115.642,51.222 ccw(c117.753,53.333) 117.753,50.348 ; 126.173,49.886 124.166,49.886 ; CP10.1@129.112,13.741 CP10.1@130.099,14.728 ; 132.156,11.633 131.42,10.897 ; 132.156,25.171 130.099,23.114 ; J4.2@115.29,50.348 117.678,50.348 ; J4.2@115.29,50.348 115.011,50.627 119.223,50.627 ; J4.2@115.29,50.348 118.953,46.685 121.341,46.685 ; 117.678,50.348 cw(c117.678,53.154) 115.65,51.215 ccw(c117.678,53.154) 117.678,50.348 ; 117.678,50.348 121.341,46.685 ; 117.678,50.348 119.502,50.348 ; 119.223,50.627 126.233,50.627 ; 119.223,50.627 119.502,50.348 ; 119.502,50.348 123.704,50.348 124.166,49.886 ; 119.502,50.348 119.964,49.886 ; 119.964,49.886 121.902,47.948 126.104,47.948 ; 119.964,49.886 124.166,49.886 ; 121.341,46.685 125.959,46.685 ; 124.166,49.886 126.104,47.948 ; 125.959,46.685 128.219,44.425 ; 125.959,46.685 127.367,46.685 ; 126.104,47.948 127.367,46.685 ; 126.233,50.627 128.875,50.627 132.156,47.346 132.156,44.704 ; 126.233,50.627 126.512,50.348 132.156,44.704 ; 127.367,46.685 128.219,45.833 ; 128.219,44.425 128.219,45.833 ; 128.219,44.425 128.219,12.243 129.565,10.897 ; 128.219,45.833 130.099,43.953 130.099,42.215 ; 129.565,10.897 131.42,10.897 ; 129.565,10.897 130.099,11.43 CP10.1@130.099,14.728 ; CP10.1@130.099,14.728 130.099,23.114 ; 130.099,23.114 130.099,42.215 ; 130.099,42.215 132.156,44.272 132.156,44.704
  Bottom Layer w2.54: J4.2@115.463,50.717 cw(c117.502,48.678) 117.502,51.562 ; J4.2@116.313,51.562 124.395,51.562 ; 123.704,50.348 126.512,50.348 129.144,50.348 ; 124.801,51.562 128.459,51.562 ; 132.156,11.633 132.156,25.171 132.156,44.272
OVP_CPU: J6.3 O2.4 R118.2 | length 46
  Top Layer w0.508: R118.2@25.503,71.774 ccw(c26.389,72.068) R118.2@26.148,71.166 ; R118.2@25.623,71.306 cw(c25.623,70.08) 26.491,70.947 ; R118.2@25.623,71.433 cw(c25.623,70.513) 26.274,71.164 cw(c26.924,71.814) R118.2@26.004,71.814 ; v2(25.623,71.814) 26.698,70.739 O2.4@28.256,70.739 ; R118.2@26.004,71.687 ccw(c26.618,71.687) R118.2@26.184,71.254
  Bottom Layer w0.508: v2(25.623,71.814) 26.58,72.771 26.58,79 29.08,81.5 39.1,81.5 41.82,84.22 J6.3@41.82,95 ; v2@25.623,72.195 ccw(c25.623,73.115) 26.274,72.465 ccw(c26.924,71.814) v2@26.004,71.814 ; J6.3@41.469,94.649 cw(c40.623,93.803) 41.82,93.803 cw(c43.017,93.803) J6.3@42.171,94.649
PA_STATE_A_CPU: J6.4 O1.4 | length 53.4
  Top Layer w0.508: v1@28.1,59.228 ccw(c27.726,59.603) 28.256,59.603 ; O1.4@28.256,59.721 ccw(c28.952,59.721) v1@28.46,59.228 ; O1.4@28.256,59.944 28.256,59.073 v1(28.28,59.048)
  Bottom Layer w0.508: v1@28.1,59.228 ccw(c27.667,59.662) 28.28,59.662 ccw(c28.893,59.662) v1@28.46,59.228 ; v1(28.28,59.048) 28.28,77.3 30.58,79.6 41,79.6 44.36,82.96 J6.4@44.36,95 ; J6.4@44.009,94.649 cw(c43.163,93.803) 44.36,93.803 cw(c45.557,93.803) J6.4@44.711,94.649
RCA: CP1A.1 R1A.2 T1.3 | length 19.8
  Bottom Layer w0.508: T1.3@13.204,25.19 15.084,27.07 CP1A.1@15.084,30.487 15.312,30.487 16.668,31.842 R1A.2@16.668,35.305 ; T1.3@13.204,25.936 ccw(c13.204,27.737) 14.478,26.464 ccw(c15.751,25.19) T1.3@13.95,25.19 ; CP1A.1@14.725,30.128 cw(c13.857,29.26) 15.084,29.26 cw(c16.31,29.26) CP1A.1@15.443,30.128 ; CP1A.1@15.084,30.995 ccw(c15.084,32.773) 16.341,31.516 ; CP1A.1@15.592,30.487 cw(c16.266,30.487) CP1A.1@15.789,30.964 ; R1A.2@16.399,34.908 cw(c15.748,34.258) 16.668,34.258 cw(c17.588,34.258) R1A.2@16.937,34.908
SD: D1.1 D1A.2 D2.1 | length 47.1
  Top Layer w0.508: v1@21.889,43.871 ccw(c21.456,43.437) 21.456,44.05 ccw(c21.456,44.664) v1@21.889,44.23 ; v1(22.069,44.05) 20.824,44.05 19.351,42.577 19.351,31.833 20.824,30.36 20.824,20.53 22.297,19.057 v1(23.72,19.057) 23.72,13.647 D1.1@25.015,12.351 ; v1@23.54,19.236 cw(c23.107,19.67) 23.107,19.057 cw(c23.107,18.444) 23.54,18.877 cw(c23.107,18.444) 23.72,18.444 cw(c24.333,18.444) v1@23.899,18.877 ; D1.1@24.769,12.351 ccw(c24.175,12.351) 24.595,12.771 ccw(c25.015,13.191) D1.1@25.015,12.597
  Bottom Layer w0.508: v1(22.069,44.05) 23.074,44.05 D1A.2@23.079,44.056 ; v1@22.248,43.871 cw(c22.682,43.437) 22.682,44.05 cw(c22.682,44.664) v1@22.248,44.23 ; v1@22.273,44.201 ccw(c22.523,44.386) D1A.2@22.604,44.086 ; v1@22.277,43.905 cw(c22.523,43.734) D1A.2@22.6,44.023 ; v1@22.472,44.05 ccw(c22.472,44.662) D1A.2@22.905,44.23 ; v1@22.498,44.05 cw(c22.498,43.474) D1A.2@22.905,43.882 ; v1(23.72,19.057) 24.939,19.057 D2.1@24.99,19.006 ; v1@23.899,18.877 cw(c24.333,18.444) 24.333,19.057 cw(c24.333,19.67) v1@23.899,19.236 ; 24.273,19.057 cw(c24.273,18.289) D2.1@24.816,18.832
UVP_CPU: J6.2 O3.4 R121.2 | length 57.2
  Top Layer w0.508: R121.2@25.425,64.307 cw(c26.238,63.494) 26.238,64.643 ccw(c26.238,63.621) R121.2@25.515,64.344 ; v1(25.605,64.127) 26.121,64.643 O3.4@28.256,64.643 ; R121.2@25.605,64.381 ccw(c25.605,64.994) 26.038,64.561 ccw(c26.472,64.127) R121.2@25.859,64.127 ; R121.2@25.679,64.37 ccw(c26.076,65.666) 26.753,64.492 ; R121.2@25.784,63.947 cw(c27.464,62.267) 27.464,64.643 ccw(c27.464,62.394) R121.2@25.874,63.985 ; R121.2@25.855,64.171 cw(c26.332,64.256) R121.2@26.089,64.676 ; 27.439,64.636 cw(c27.536,64.276) O3.4@27.722,64.599
  Bottom Layer w0.508: v1@25.351,64.127 ccw(c24.737,64.127) 25.171,64.561 ccw(c25.605,64.994) v1@25.605,64.381 ; v1(25.605,64.127) 24.04,65.692 24.04,79.94 27.6,83.5 36.7,83.5 39.28,86.08 J6.2@39.28,95 ; J6.2@38.929,94.649 cw(c38.083,93.803) 39.28,93.803 cw(c40.477,93.803) J6.2@39.631,94.649
V_SAMPLING: J6.9 T3.2 | length 47.2
  Top Layer w0.762: J6.9@56.799,94.739 cw(c56.169,94.109) 57.06,94.109 cw(c57.951,94.109) J6.9@57.321,94.739 ; J6.9@57.06,95 57.06,93.04 81.51,68.59 T3.2@88.377,68.59 ; T3.2@87.94,68.152 ccw(c86.883,67.095) 86.883,68.59 ccw(c86.883,70.084) T3.2@87.94,69.028
VCC_A: Q105A.3 R20A.2 R21A.2 | length 44.9
  Top Layer w0.762: v2(51.304,38.818) 51.304,24.899 53.387,22.816 60.931,22.816 Q105A.3@62.023,22.816 ; 61.18,22.826 cw(c61.18,21.815) Q105A.3@61.895,22.53 ; 61.249,22.796 ccw(c61.249,23.536) Q105A.3@61.819,23.063 ; 61.3,22.797 cw(c61.3,22.057) Q105A.3@61.87,22.53 ; 61.307,22.843 ccw(c61.307,23.855) Q105A.3@62.022,23.139 ; Q105A.3@61.362,22.809 ccw(c61.362,23.55) Q105A.3@61.931,23.077 ; Q105A.3@62.291,22.694 Q105A.3@62.337,22.74
  Bottom Layer w0.508: R21A.2@48.525,39.031 R20A.2@51.37,39.031 ; R21A.2@48.911,38.615 cw(c49.916,37.609) 49.916,39.031 ; R21A.2@48.911,39.387 ccw(c49.77,40.245) 49.77,39.031 ; 49.87,39.031 cw(c49.87,37.384) R20A.2@51.035,38.549 ; 49.97,39.031 ccw(c49.97,40.5) R20A.2@51.009,39.461 ; 50.184,39.031 cw(c50.184,37.864) R20A.2@51.009,38.689 ; R20A.2@50.615,38.916 ccw(c50.748,39.146) R20A.2@50.976,39.011
  Bottom Layer w0.762: R21A.2@48.525,39.001 51.37,39.001 R20A.2@51.395,38.975 ; R21A.2@48.821,38.704 cw(c49.536,37.989) 49.536,39.001 cw(c49.536,40.012) R21A.2@48.821,39.297 ; 50.25,39.001 cw(c50.25,37.764) R20A.2@51.125,38.638 ; 50.322,39.001 cw(c50.322,37.902) R20A.2@51.099,38.679 ; 50.445,39.001 ccw(c50.445,39.925) R20A.2@51.099,39.272 ; v2(51.304,38.818) R20A.2@51.304,38.935
pads on no net: CH1.8 CH1.B12 CH1.B14 CH1.B16 CH1.B18 CH1.B20 CH1.B22 CH1.B24 CH1.B28 CH1.D14 CH1.D16 CH1.D22 CH1.D24 CH1.D28 CH1.Z12 CH1.Z14 CH1.Z16 CH1.Z22 CH1.Z24 CH1.Z28 P1A.1 T1.4 T2.4 T3.4
copper on no net: | length 64.6
  Top Layer w2.286: 5.9,94.45 12.95,94.45 ; 6.888,93.462 cw(c9.273,91.077) 9.273,94.45 cw(c9.273,97.823) 6.888,95.438 ; 8.8,94.45 ccw(c8.8,99.7) 12.512,95.988 ; 89.75,98.75 93.5,95 97.25,98.75 ; 91.115,97.385 cw(c88.73,95) 92.103,95 ; 94.897,95 cw(c98.27,95) 95.885,97.385
  Bottom Layer w1.27: 89.161,99.339 93.5,95 ; 90.389,98.111 96.13,98.111 96.215,98.196 ; 91.618,98.111 95.666,98.111 95.834,97.942 ; 92.024,97.866 93.5,96.39 93.5,95 ; 93.421,98.349 93.5,98.27 93.5,95 ; 94.869,97.739 93.5,96.37 93.5,95 ; 97.612,98.958 93.654,95 93.5,95

## Polygon pours and split planes (outlines as drawn)
"ANALOG GND" on Bottom Layer "Top Layer-No Net" (hatched 90Degree grid 0.203 track 0.508, remove dead copper, pour order 6): 20,3 18,5 18,9 13,14 13,36 13,38 16,41 18,43 18,54 22,58 24,58 42.791,58 47,53.791 47,12 49,10 56,10 57,9 57,4 56,3
"ANALOG GND" on Bottom Layer "Top Layer-No Net" (hatched 90Degree grid 0.203 track 0.508, remove dead copper, pour order 8): 57,9 57,13 56,14 54,14 53,13 53,11 51,9
"ANALOG GND" on Top Layer "Top Layer-No Net" (hatched 90Degree grid 0.203 track 0.508, remove dead copper, pour order 5): 20,3 18,5 18,9 13,14 13,36 13,38 16,41 18,43 18,54 22,58 24,58 42.791,58 47,53.791 47,12 49,10 56,10 57,9 57,4 56,3
"ANALOG GND" on Top Layer "Top Layer-No Net" (hatched 90Degree grid 0.203 track 0.508, remove dead copper, pour order 7): 57,9 57,13 56,14 54,14 53,13 53,11 52,10

## Keep-outs
Top Overlay:
  circle w0.254: c82.381,40.977 r5.047

## Other copper
Top Layer:
  rectangle: 91,97 96.5,99
  rectangle: 157.5,92.5 162,99
  rectangle: 16,98.5 162,100
  rectangle: 2,90 16,100
  rectangle net EARTH: 2.5,0 10,10
  rectangle net EARTH: 2.5,0 146,1.5
  rectangle net EARTH: 146,0 162,7
Bottom Layer:
  rectangle: 157.5,92.5 162,98.5
  rectangle: 16,98.5 162,100
  rectangle: 2.5,90 16,100
  rectangle net EARTH: 2.5,1.5 10,10
  rectangle net EARTH: 2.5,0 159,1.5
  rectangle net EARTH: 158,0 162,7

## Silkscreen, mask and mechanical layers (free items; w line width, h text height)
Top Overlay:
  drawing of 2767 lines, arcs and shapes, not listed
  text "23.24 (mm)" at 18.112,94.086 h1.52
  text "13.58 (mm)" at 79.829,91.343 h1.52
  text "下   中   上" at 2.5,81.3 h1.52
  text "2013-10-10" at 130.638,81.261 h1.02
  text "功放板" at 133.1,79 h1.5
  text "BHC-A-2030-01 V1.0" at 127.4,76.3 h2
  text "50 (mm)" at 162.914,70.15 h1.52 r90
  text "80 (mm)" at -4.586,45.254 h1.52 r90
  text "100 (mm)" at -2.332,44.515 h1.52 r90
  text "50 (mm)" at 162.914,20.15 h1.52 r90
  text "162 (mm)" at 75.515,-1.914 h1.52
  text "68 (mm)" at 39.65,-2.914 h1.52
Bottom Overlay:
  lines w0.127: 65.314,40.97 92.313,40.97 ; 65.339,25.343 91.932,25.343 ; 85.359,19.247 85.367,19.247
  lines w0.152: 13,48.108 19.198,48.108 19.833,47.473 19.833,43.79 21.23,42.393 30.755,42.393 ; 22.042,15.672 25.802,15.672 26.233,16.104 26.843,16.104
Top Solder:
  region: 104.242,36.474 101.346,36.474 101.346,34.747 104.242,34.747
  rectangle: 93.751,34.747 96.672,36.474
  rectangle: 91,94.5 96,99
  rectangle: 146.863,1.5 162,7
  rectangle: 2.5,0 162,1.5
  rectangle: 2.5,98.5 162,100
  rectangle: 2.5,90 10,99
  rectangle: 157.5,92.5 162,98.5
  rectangle: 2.5,1 10,10
  region: 86.904,18.263 85.482,16.84 85.482,11.176 86.269,10.389 88.352,10.389 94.27,16.307 94.27,18.263
  lines w0.203: 97.5,99 93.5,95 ; 93.5,95 93.5,95
  lines w1.524: 90,99 93.5,95.5 ; 97,99 93.5,95.5 ; 93.5,95.5 93.5,95 93.5,95.5
Bottom Solder:
  rectangle: 158,1.5 162,7
  rectangle: 10,0 162,1.5
  rectangle: 2.5,90 10,100
  rectangle: 10,98.5 162,100
  rectangle: 157.5,92.5 162,100
  rectangle: 2.5,0 10,10
  rectangle: 90.5,97 96.5,99
  rectangle: 92,94.5 95,99
  region: 86.917,18.149 85.495,16.726 85.495,11.062 86.282,10.275 88.365,10.275 94.283,16.193 94.283,18.149
  lines w1.524: 89,99 93,95 93.5,95 94,95 98,99
Mechanical 1:
  lines w0.508: 2.5,100 2.5,100
  lines w1.2: 0,90 0,10 2.5,10 2.5,0 162,0 162,100 2.5,100 2.5,100 2.5,90
Mechanical 2:
  lines w0.508: 2.5,100 162,100 162,0 2.5,0 2.5,10 0,10 0,90 2.5,90 2.5,100
  lines w1.2: 0,90 2.5,90
  text "机械层2  定义外形尺寸  TP1上下两个圆为开孔" at 68,-7.7 h3.81

## Text inside footprints (layer, text, board x,y; h text height)
FETA: Bottom Overlay "S1\D2" at 64.817,41.481 h1.27 r180; Bottom Overlay "G2" at 64.817,43.183 h1.27 r180; Bottom Overlay "S2" at 64.817,44.936 h1.27 r180; Bottom Overlay "G1" at 64.817,39.754 h1.27 r180; Bottom Overlay "D1" at 64.817,38.052 h1.27 r180
LED2: Top Overlay "+" at 7.597,69.533 h2 r90
LED3: Top Overlay "+" at 7.597,63.203 h2 r90
LED4: Top Overlay "+" at 7.597,56.833 h2 r90
LED5: Top Overlay "+" at 7.597,50.433 h2 r90
LED6: Top Overlay "+" at 7.597,44.033 h2 r90
LED7: Top Overlay "+" at 7.597,37.933 h2 r90
Q105A: Bottom Overlay "3" at 66.877,23.309 h1.5 r90; Bottom Overlay "2" at 66.877,25.849 h1.5 r90; Bottom Overlay "1" at 66.877,28.139 h1.5 r90